# Altium PCB PCB1.PcbDoc
Units mil, origin at the board's own origin, x right, y up, seen from the top; angles counter-clockwise.
Board outline 6000 x 4000 mil, 2 copper layers (Top Layer, Bottom Layer); 14 components, 10 nets, 41 pads, 0 vias.
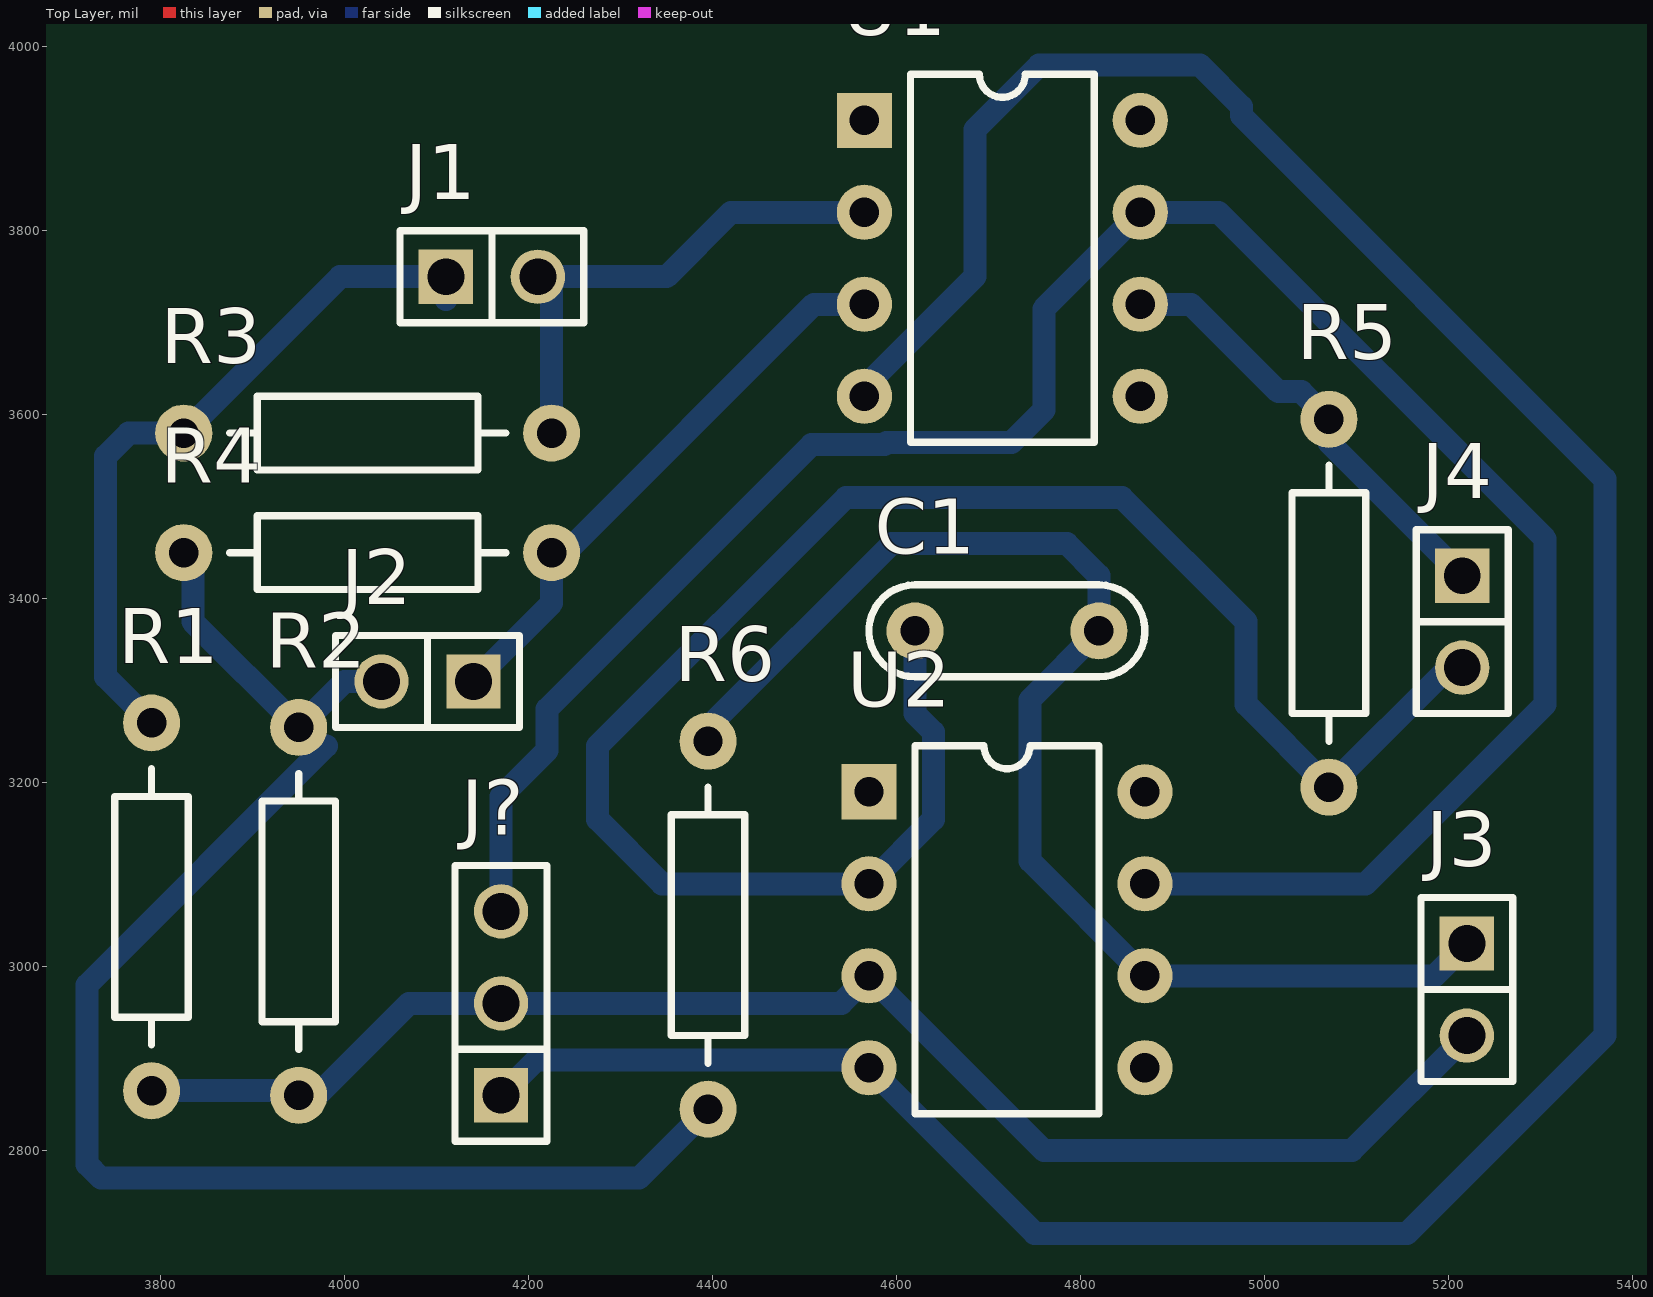
[diagram p0: Top Layer view]
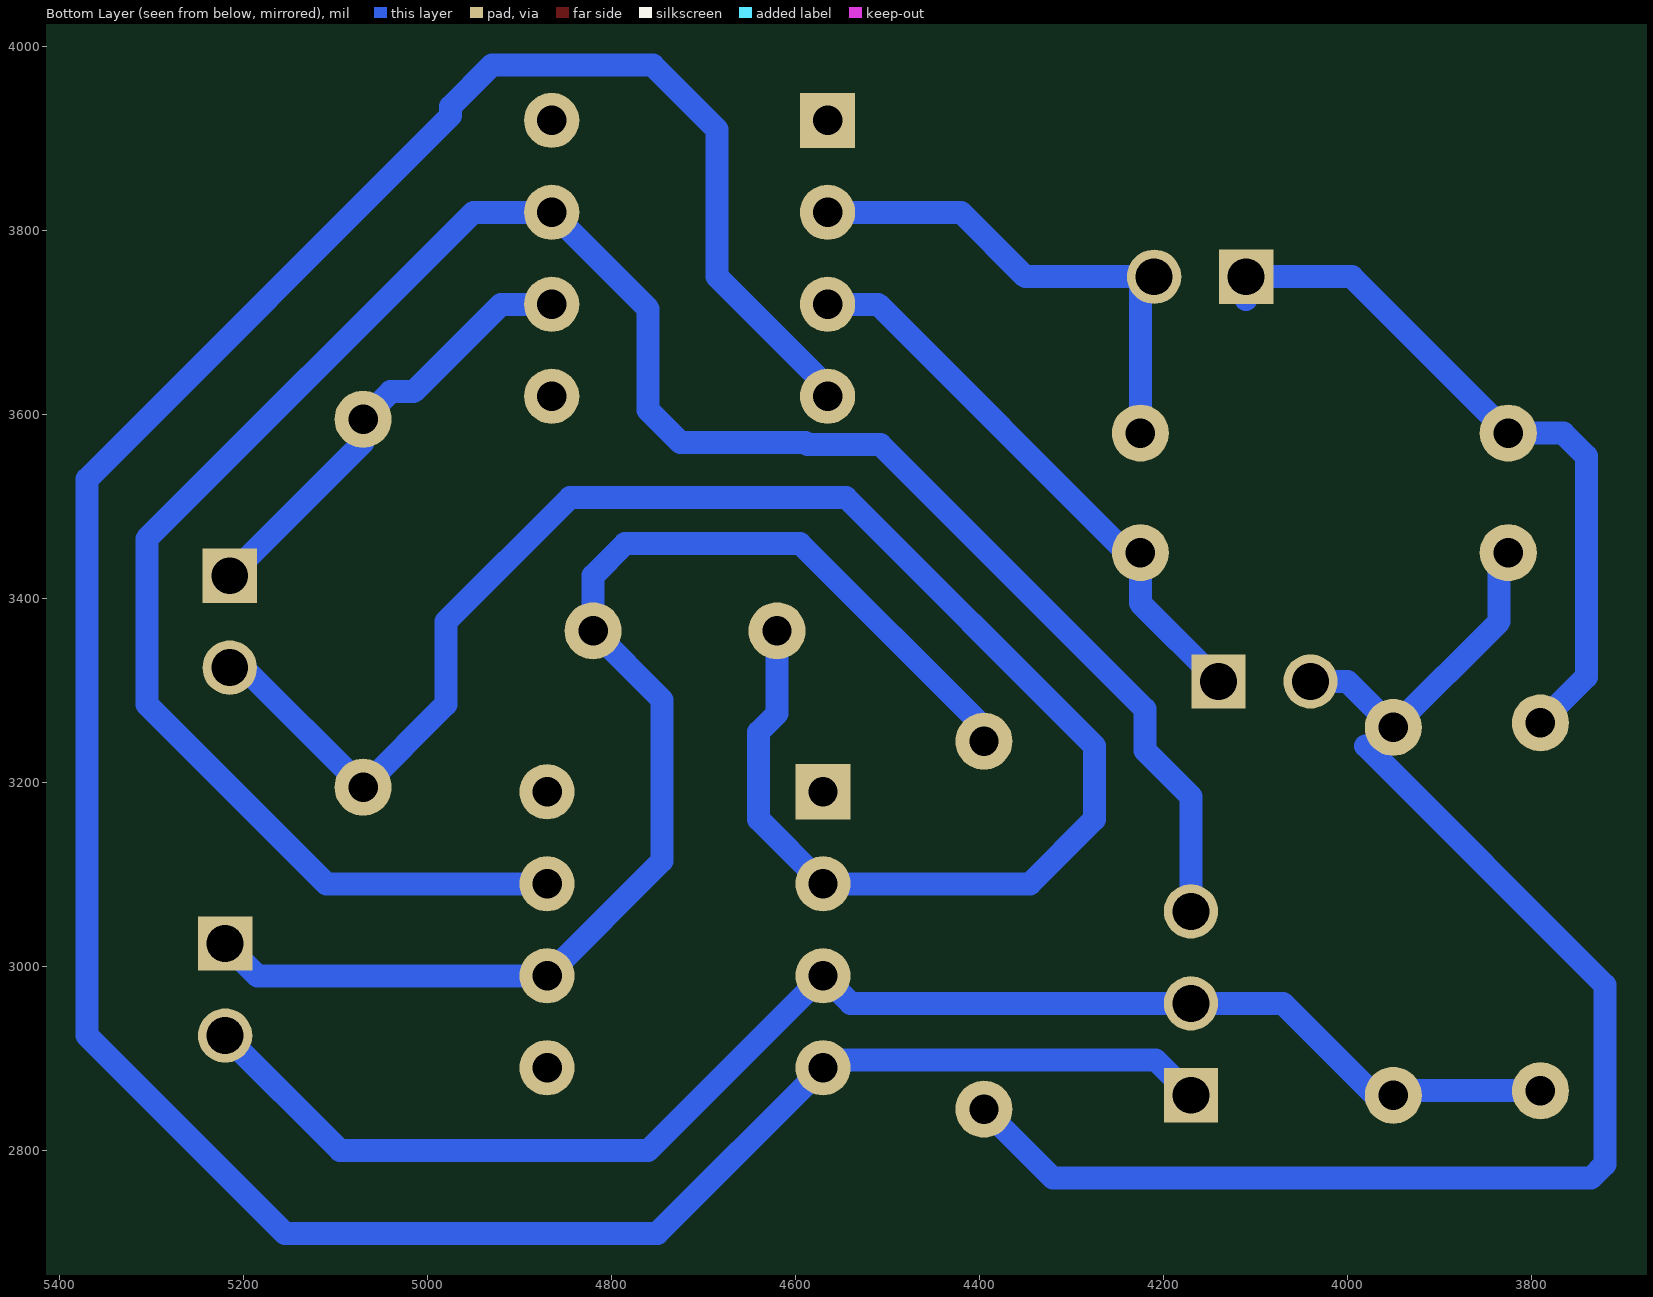
[diagram p1: Bottom Layer view, seen from below]
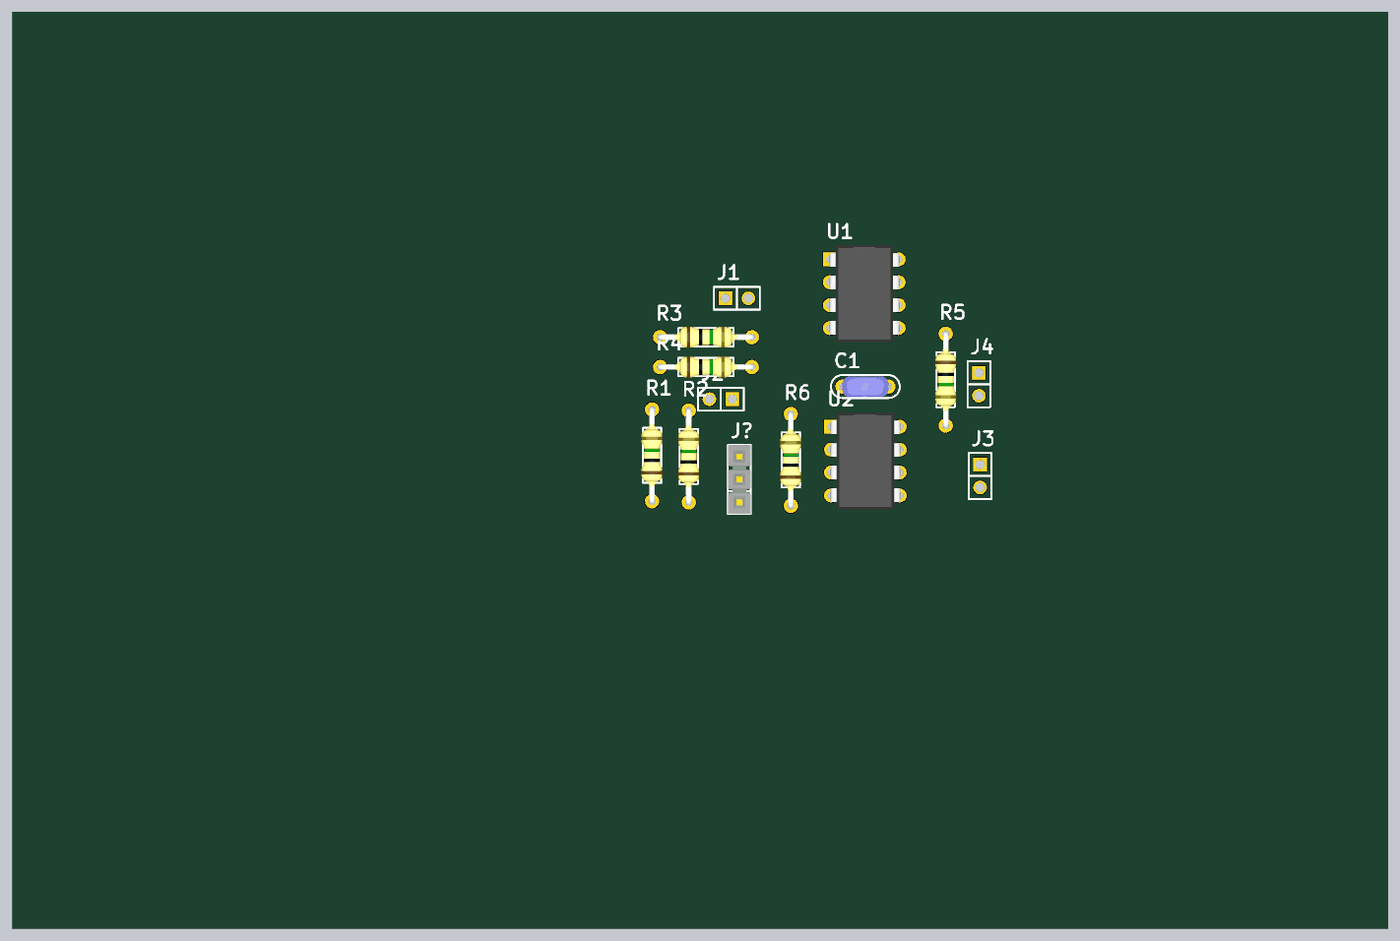
[diagram p2: 3D render of the assembled board from above, using the file's embedded part models]

## Layer stack, top to bottom
Top Solder: solder mask 0.4, Solder Resist, Dk 3.5
Top Layer: signal copper 1.4
Dielectric 1: dielectric 12.6, FR-4, Dk 4.8
Bottom Layer: signal copper 1.4
Bottom Solder: solder mask 0.4, Solder Resist, Dk 3.5

## Board outline
1000,1000 7000,1000 7000,5000 1000,5000

## Design rules (kind name [scope] priority, off if disabled: settings)
Clearance [All] p1: gap=10 ignorepadtopadclearanceinfootprint=FALSE except(0: Arc-Hole Track-Hole SMDPad-Hole THPad-Hole Via-Hole Fill-Hole Poly-Hole Region-Hole Text-Hole)
PolygonConnect [All] p1: connectstyle=Relief reliefconductorwidth=10 reliefentries=4 polygonreliefangle="90 Angle" airgapwidth=10
RoomDefinition esquematico [InComponentClass('esquematico')] p1: confinementstyle=ConfineIn formatcopy=TRUE lockcomponents=FALSE outline 3690,2665 5400,2665 5400,4010 3690,4010
RoutingVias [All] p1: holewidth=28 width=50 viastyle="Through Hole" minholewidth=28 minwidth=50 maxholewidth=28 maxwidth=50
SolderMaskExpansion [All] p1: expansion=4
Width [All] p1: maxlimit=25 minlimit=25 preferedwidth=25
30 further rules are at their usual default settings.

## Components (designator, comment, footprint, x,y, rotation, side; value= is the part's Value field where it differs from the comment)
C1 "CAP" CAP200 4720,3365 r0 top
J1 "CON2" SIP2 4160,3750 r0 top
J2 "CON2" SIP2 4090,3310 r180 top
J3 "CON2" SIP2 5220,2975 r270 top
J4 "CON2" SIP2 5215,3375 r270 top
J? "CON3" SIP3 4170,2960 r90 top
R1 "RES" RES400 3790,2865 r90 top
R2 "RES" RES400 3950,2860 r90 top
R3 "RES" RES400 3825,3580 r0 top
R4 "RES" RES400 3825,3450 r0 top
R5 "RES" RES400 5070,3595 r270 top
R6 "RES" RES400 4395,2845 r90 top
U1 "IC_DIP8" DIP8 4565,3920 r0 top
U2 "IC_DIP8" DIP8 4570,3190 r0 top

## Footprints (in the part's own frame and the unit in brackets; to place one, negate y for a bottom-side part, rotate by r counter-clockwise, add the part's x,y. Pads: shape width x height; smd on the part's side, far side on the other; paste and mask are expansions set on the pad)
CAP200 [mil]
  round 62 hole 32: 1(-100,0) 2(100,0)
  silkscreen extent -150,-50 150,50, body extent -110,-46 110,44, height 246
DIP8 [mil]
  rect 60x60 hole 32: 1(0,0)
  round 60 hole 32: 2(0,-100) 3(0,-200) 4(0,-300) 5(300,-300) 6(300,-200) 7(300,-100) 8(300,0)
  silkscreen extent 50,-350 250,50, body extent -3,-363 303,63, height 177
RES400 [mil]
  round 62 hole 32: 1(0,0) 2(400,0)
  silkscreen extent 50,-40 350,40, body extent -12,-45 412,46, height 96
SIP2 [mm]
  rect 1.5x1.5 hole 1.016: 1(-1.27,0)
  round 1.5 hole 1.016: 2(1.27,0)
  silkscreen extent -2.54,-1.27 2.54,1.27
SIP3 [mm]
  rect 1.5x1.5 hole 1.016: 1(-2.54,0)
  round 1.5 hole 1.016: 2(0,0) 3(2.54,0)
  silkscreen extent -3.81,-1.27 3.81,1.27, body extent -3.81,-1.3 3.81,1.24, height 8.38

## Nets (pads, with @x,y where several pads share a name; then routed paths per layer and width w, separated by ;. In a path a pad name is that pad's centre, name@x,y a point inside that pad or via, vN(x,y) a via of type N, cw(c..) or ccw(c..) an arc to the next point about the centre after c; other vN are vias at no path point)
GND: J3.2 J?.2 R1.1 R2.1 U2.3 | length 1616.4
  Bottom Layer w25: R1.1 3945,2865 R2.1 3970,2860 4070,2960 J?.2 4540,2960 U2.3 4760,2800 5095,2800 J3.2
NetC1_1: C1.1 J4.2 R5.2 U2.2 | length 2005.2
  Bottom Layer w25: C1.1 4620,3275 4640,3255 4640,3160 U2.2 4345,3090 4275,3160 4275,3240 4545,3510 4845,3510 4980,3375 4980,3285 R5.2 5200,3325 J4.2
NetC1_2: C1.2 J3.1 R6.2 U2.6 | length 1419.7
  Bottom Layer w25: R6.2 4395,3260 4595,3460 4785,3460 4820,3425 C1.2 4745,3290 4745,3115 U2.6 5185,2990 J3.1
NetJ1_1: J1.1 R1.2 R3.1 | length 786.5
  Bottom Layer w25: R1.2 3740,3315 3740,3555 3765,3580 R3.1 3995,3750 J1.1 J1.1@4110,3725
NetJ1_2: J1.2 R3.2 U1.2 | length 560.2
  Bottom Layer w25: R3.2 4225,3735 J1.2 4350,3750 4420,3820 U1.2
NetJ2_1: J2.1 R4.2 U1.3 | length 627
  Bottom Layer w25: J2.1 4225,3395 R4.2 4240,3450 4510,3720 U1.3
NetJ2_2: J2.2 R2.2 R4.1 R6.1 | length 1627.5
  Bottom Layer w25: R4.1 3835,3440 3835,3375 R2.2 4000,3310 J2.2 ; 3980,3240 3720,2980 3720,2785 3735,2770 4320,2770 R6.1
NetJ4_1: J4.1 R5.1 U1.6 | length 486.8
  Bottom Layer w25: U1.6 4920,3720 5015,3625 5040,3625 R5.1 5070,3570 J4.1
NetJ?_1: J?.1 U1.4 U2.4 | length 3239
  Bottom Layer w25: J?.1 4208.5,2898.5 4570,2898.5 U2.4 4750,2710 5155,2710 5370,2925 5370,3530 4975,3925 4975,3935 4930,3980 4755,3980 4685,3910 4685,3750 4565,3630 U1.4
NetJ?_3: J?.3 U1.7 U2.7 | length 2456.6
  Bottom Layer w25: J?.3 4170,3185 4220,3235 4220,3280 4507.5,3567.5 4586.75,3567.5 4589.25,3570 4725,3570 4760,3605 4760,3715 U1.7 4950,3820 5305,3465 5305,3285 5110,3090 U2.7
pads on no net: U1.1 U1.5 U1.8 U2.1 U2.5 U2.8